# Altium PCB PCB.PcbDoc
Units mm, origin at the board's own origin, x right, y up, seen from the top; angles counter-clockwise.
Board outline 112.17 x 102 mm, 2 copper layers (Top Layer, Bottom Layer), stack 1.569 mm thick; 58 components, 27 nets, 185 pads, 328 vias.
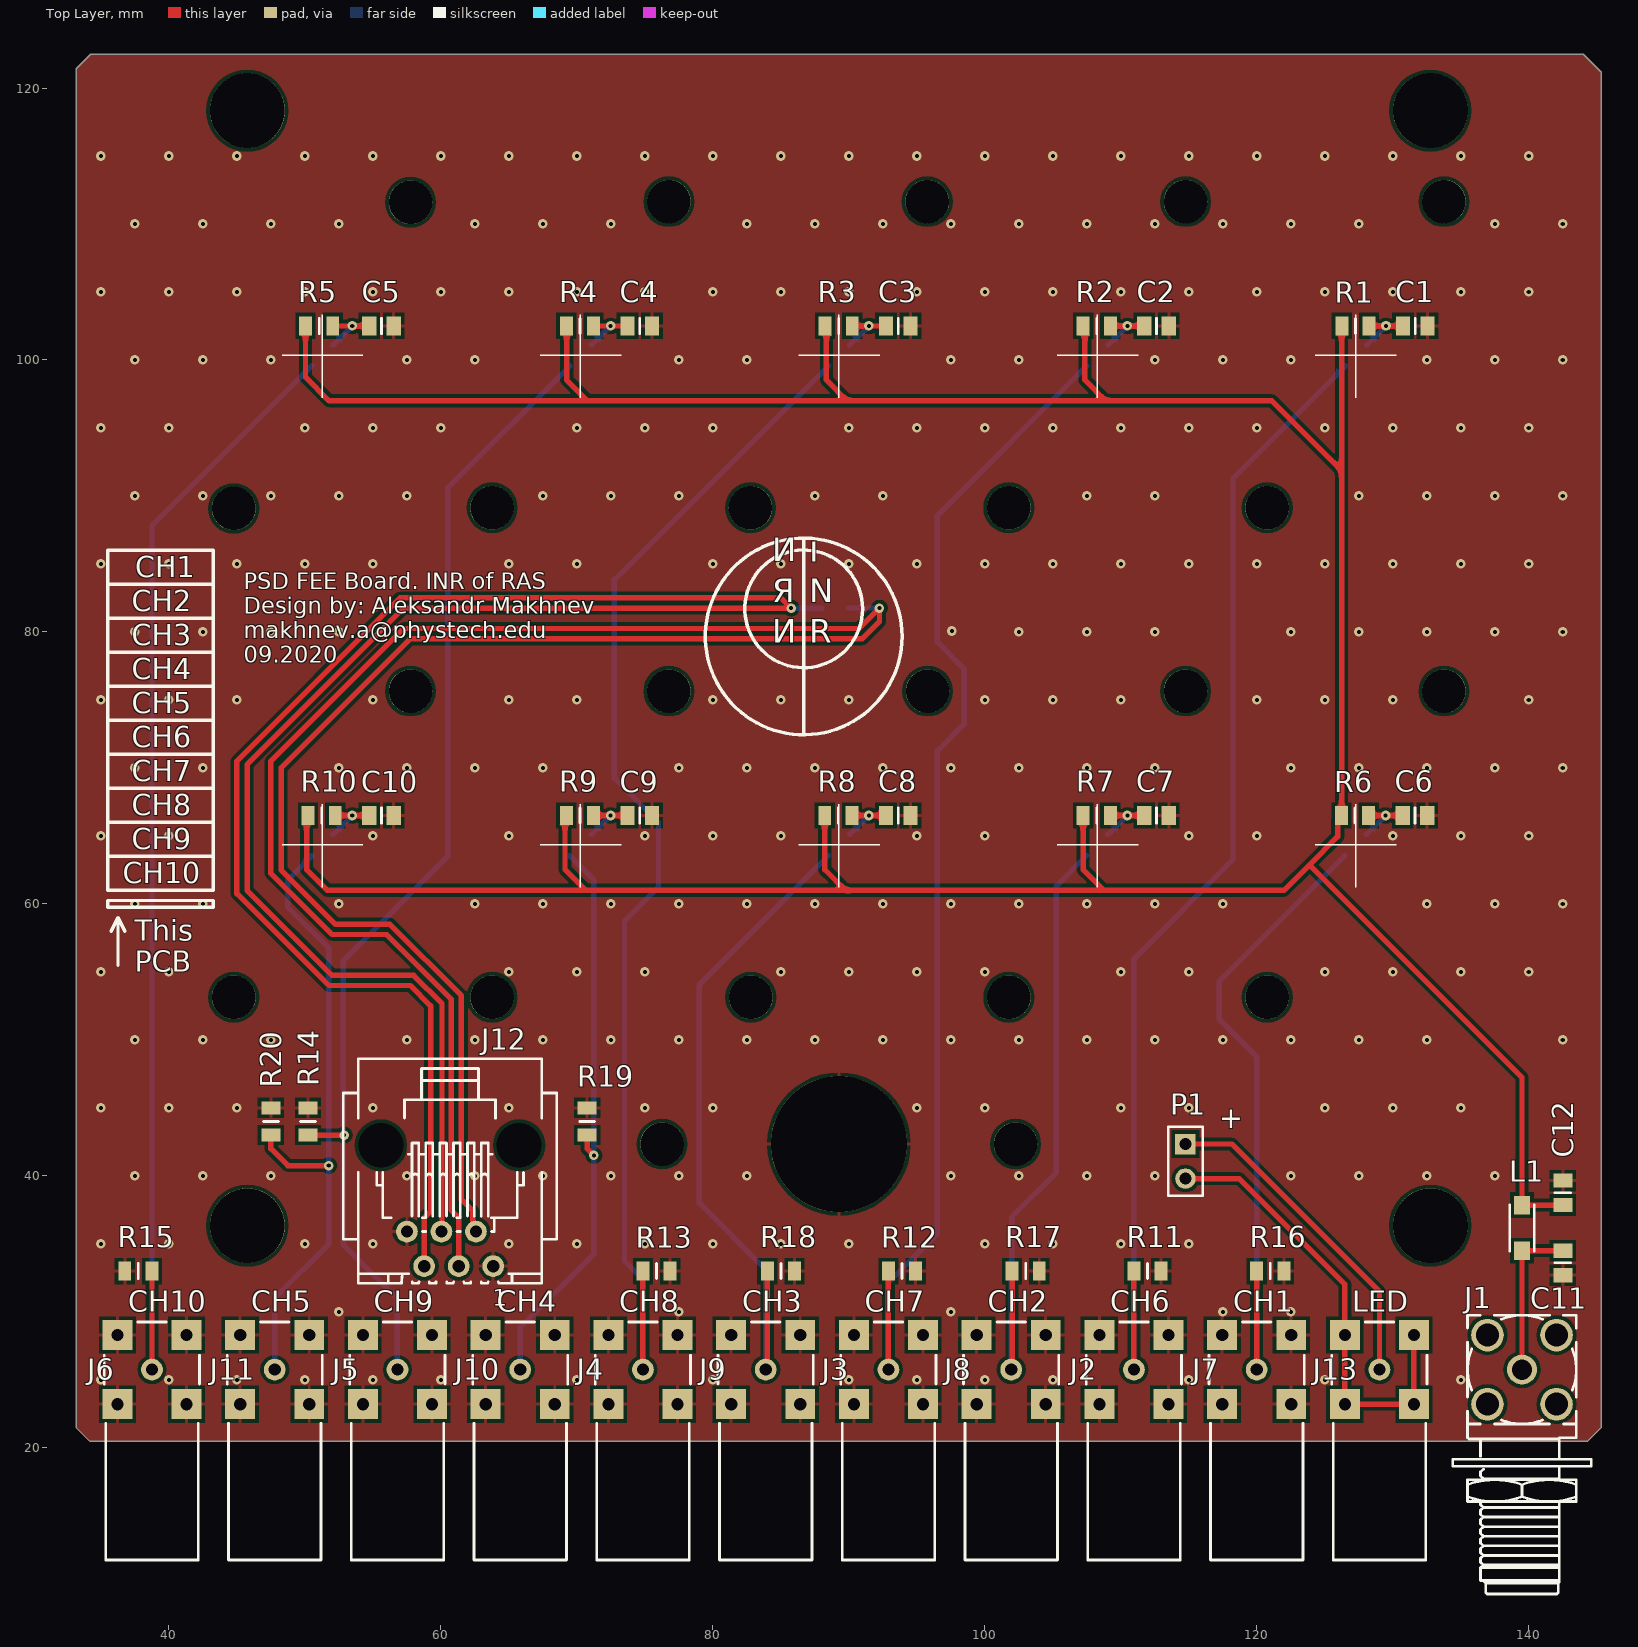
[diagram p0: Top Layer view]
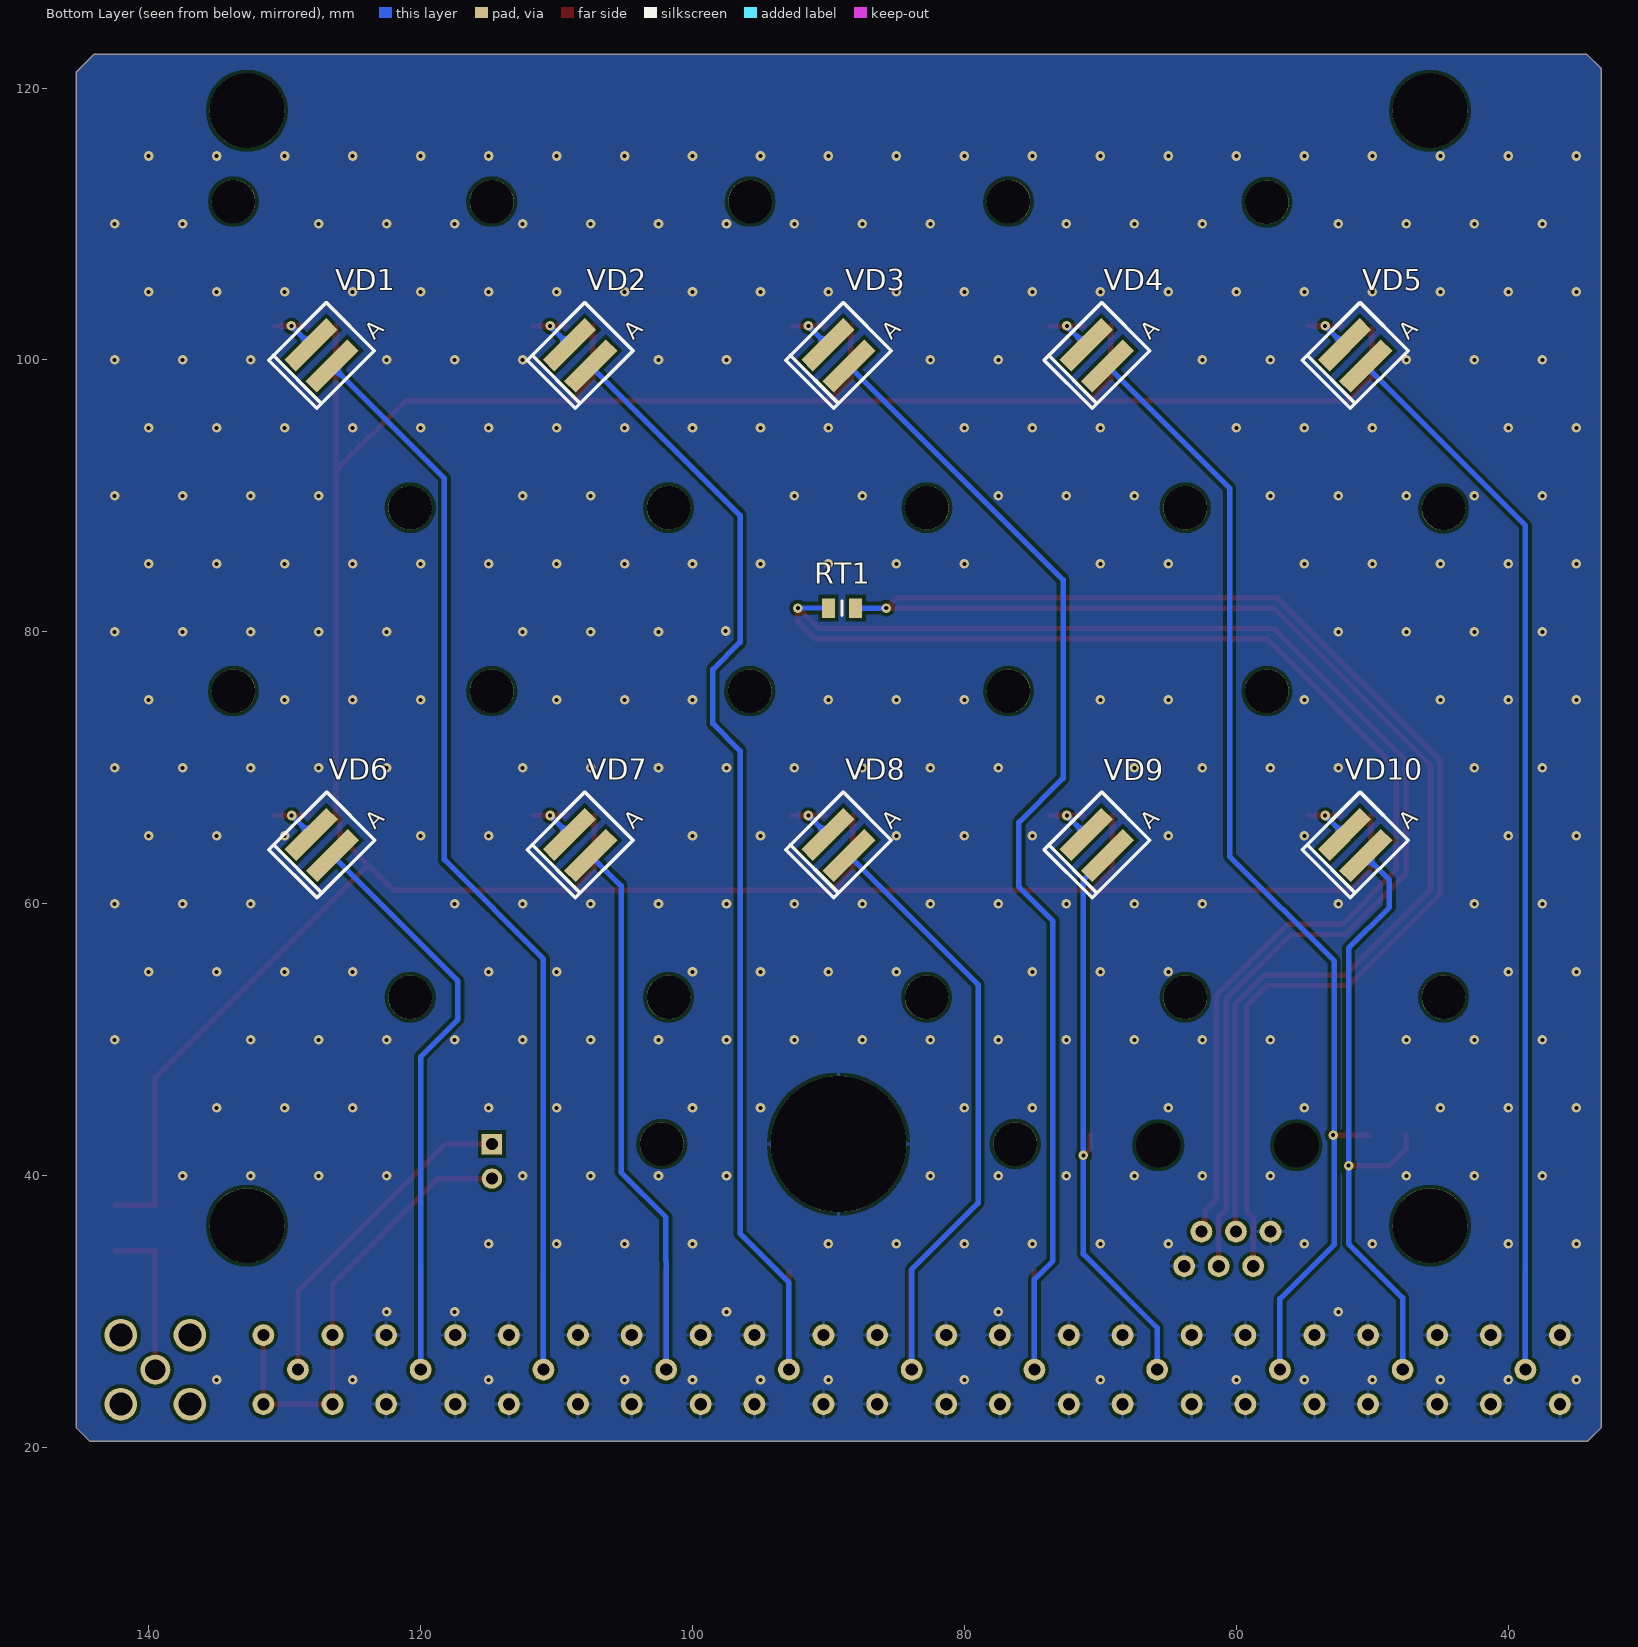
[diagram p1: Bottom Layer view, seen from below]
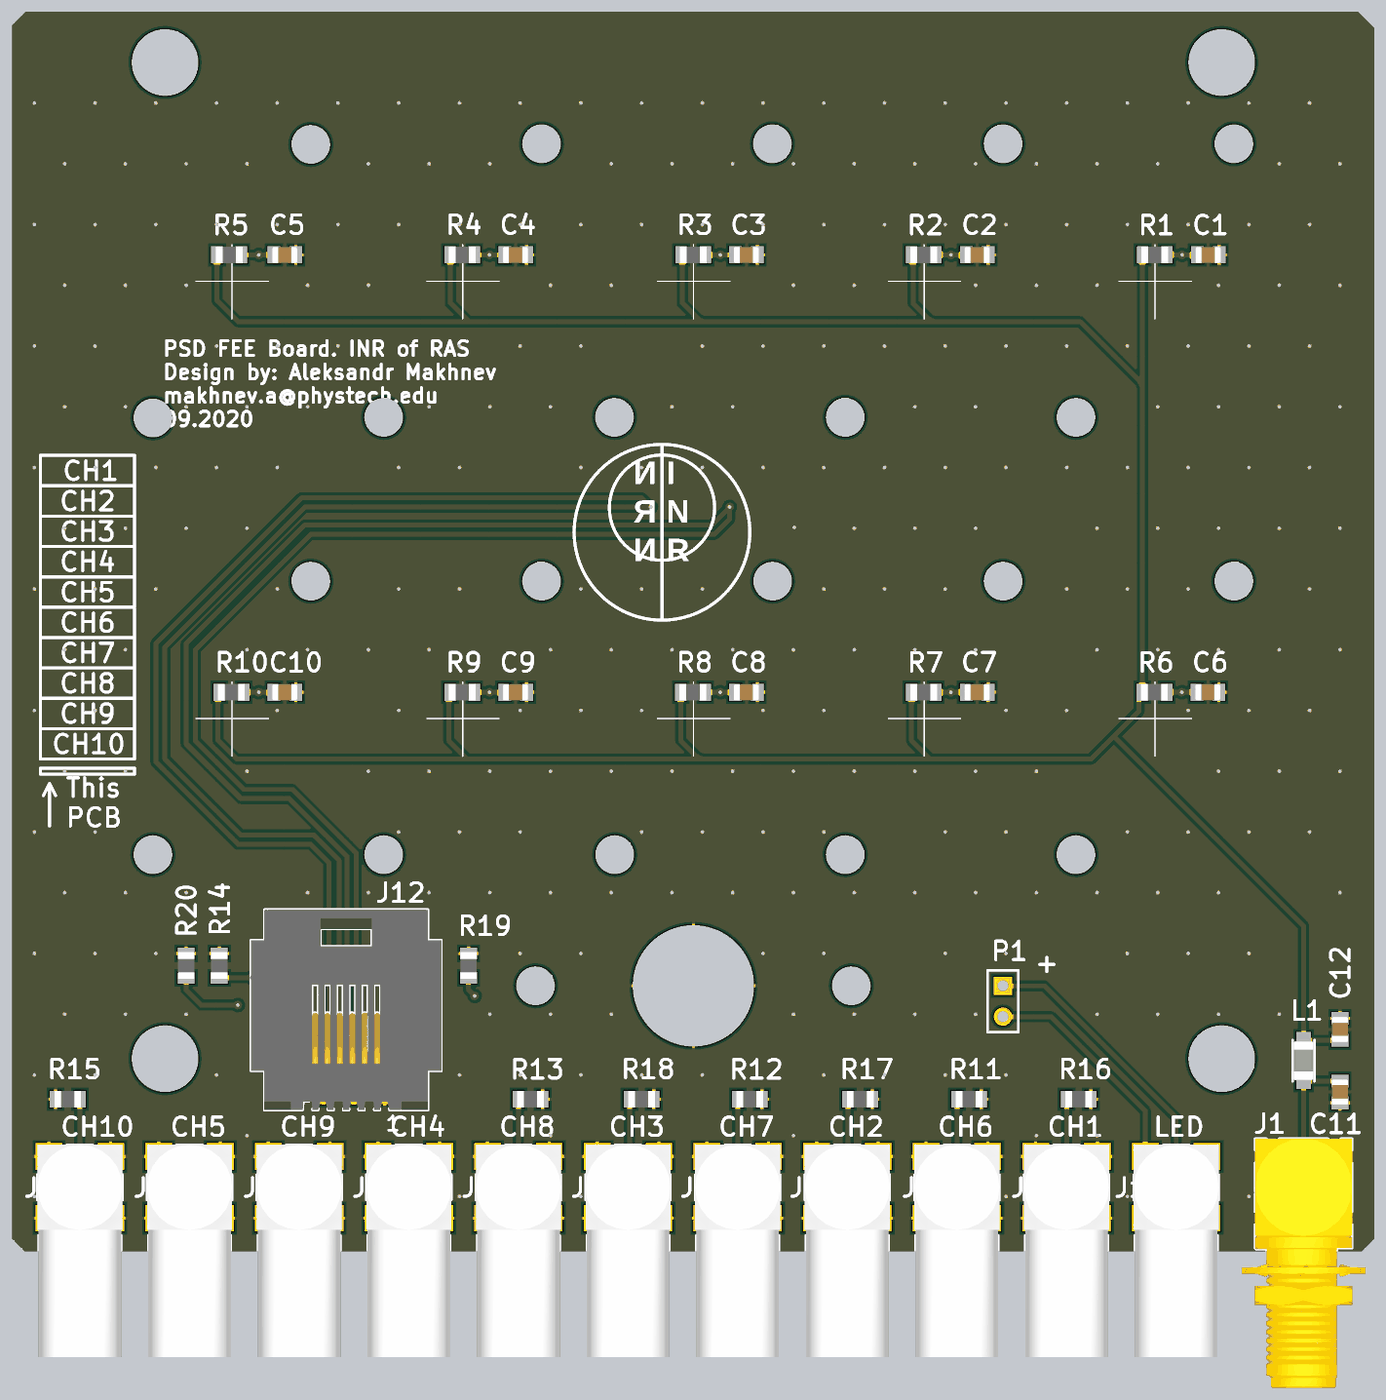
[diagram p2: 3D render of the assembled board from above, using the file's embedded part models]

## Layer stack, top to bottom
Top Solder: solder mask 0.0254, SM-001, Dk 4
Top Layer: signal copper 0.035
Dielectric 1: core 1.4986, Core-043, Dk 4.3
Bottom Layer: signal copper 0.035
Bottom Solder: solder mask 0.0254, SM-001, Dk 4

## Board outline
33.163,21.5 34.163,20.5 144.337,20.5 145.337,21.5 145.337,121.163 144,122.5 34.25,122.5 33.163,121.413

## Design rules (kind name [scope] priority, off if disabled: settings)
Clearance [All] p1: gap=0.254 ignorepadtopadclearanceinfootprint=FALSE except(0: Arc-Hole Track-Hole SMDPad-Hole THPad-Hole Via-Hole Fill-Hole Poly-Hole Region-Hole Text-Hole)
PolygonConnect PolygonConnect_stiching [IsVia] p1: connectstyle=Direct reliefconductorwidth=0.254 reliefentries=4 polygonreliefangle="90 Angle" airgapwidth=0.254
PolygonConnect [All] p2: connectstyle=Relief reliefconductorwidth=0.254 reliefentries=4 polygonreliefangle="90 Angle" airgapwidth=0.254
RoomDefinition Main [InComponentClass('Main')] p1: confinementstyle=ConfineIn formatcopy=TRUE lockcomponents=FALSE outline 31,7 146,7 146,126.75 31,126.75
RoutingVias [All] p1: holewidth=0.3 width=0.7 viastyle="Through Hole" minholewidth=0.3 minwidth=0.7 maxholewidth=0.3 maxwidth=0.7
SolderMaskExpansion [All] p1: expansion=0.102 istentingtop=FALSE
Width [All] p1: maxlimit=0.4 minlimit=0.15 preferedwidth=0.2
30 further rules are at their usual default settings.

## Components (designator, comment, footprint, x,y, rotation, side; value= is the part's Value field where it differs from the comment)
C1 "10nF" CAPC2012X135N 131.65,102.5 r180 top
C2 "10nF" CAPC2012X135N 112.625,102.5 r180 top
C3 "10nF" CAPC2012X135N 93.625,102.5 r180 top
C4 "10nF" CAPC2012X135N 74.625,102.5 r180 top
C5 "10nF" CAPC2012X135N 55.625,102.5 r180 top
C6 "10nF" CAPC2012X135N 131.625,66.5 r180 top
C7 "10nF" CAPC2012X135N 112.625,66.5 r180 top
C8 "10nF" CAPC2012X135N 93.625,66.5 r180 top
C9 "10nF" CAPC2012X135N 74.625,66.5 r180 top
C10 "10nF" CAPC2012X135N 55.625,66.5 r180 top
C11 "10nF" CAPC2012X135N 142.5,33.6 r90 top
C12 "10nF" CAPC2012X135N 142.5,38.75 r270 top
J1 "SMA" AMPHENOL_132203 139.5,25.75 r270 top
J2 "LEMO 00" LEMO_EPK.00.250.NTN 110.962,25.75 r270 top
J3 "LEMO 00" LEMO_EPK.00.250.NTN 92.909,25.75 r270 top
J4 "LEMO 00" LEMO_EPK.00.250.NTN 74.856,25.75 r270 top
J5 "LEMO 00" LEMO_EPK.00.250.NTN 56.803,25.75 r270 top
J6 "LEMO 00" LEMO_EPK.00.250.NTN 38.75,25.75 r270 top
J7 "LEMO 00" LEMO_EPK.00.250.NTN 119.989,25.75 r270 top
J8 "LEMO 00" LEMO_EPK.00.250.NTN 101.936,25.75 r270 top
J9 "LEMO 00" LEMO_EPK.00.250.NTN 83.883,25.75 r270 top
J10 "LEMO 00" LEMO_EPK.00.250.NTN 65.83,25.75 r270 top
J11 "LEMO 00" LEMO_EPK.00.250.NTN 47.777,25.75 r270 top
J12 "RJ12" WURTH_615006138521 60.67,34.63 r0 top
J13 "LEMO 00" LEMO_EPK.00.250.NTN 129.015,25.75 r270 top
L1 "50R@100MHz" IND_MURATA_BLM31PG 139.5,36.175 r90 top
P1 "Header 2" HDR1X2 114.75,42.337 r270 top
R1 "3R3" RESC2012X60N 127.25,102.5 r180 top
R2 "3R3" RESC2012X60N 108.225,102.5 r180 top
R3 "3R3" RESC2012X60N 89.25,102.5 r180 top
R4 "3R3" RESC2012X60N 70.225,102.5 r180 top
R5 "3R3" RESC2012X60N 51.041,102.5 r180 top
R6 "3R3" RESC2012X60N 127.225,66.5 r180 top
R7 "3R3" RESC2012X60N 108.225,66.5 r180 top
R8 "3R3" RESC2012X60N 89.225,66.5 r180 top
R9 "3R3" RESC2012X60N 70.225,66.5 r180 top
R10 "3R3" RESC2012X60N 51.225,66.5 r180 top
R11 "10k" RESC2012X60N 111.962,33 r180 top
R12 "10k" RESC2012X60N 93.909,33 r180 top
R13 "10k" RESC2012X60N 75.856,33 r180 top
R14 "10k" RESC2012X60N 50.225,44 r270 top
R15 "10k" RESC2012X60N 37.75,33 r0 top
R16 "10k" RESC2012X60N 120.989,33 r180 top
R17 "10k" RESC2012X60N 103,33 r180 top
R18 "10k" RESC2012X60N 85,33 r180 top
R19 "10k" RESC2012X60N 70.75,44 r270 top
R20 "10k" RESC2012X60N 47.5,44 r270 top
RT1 "500R" RESC2013X64N 89,81.75 r0 bottom
VD1 "S12572-010P Hamamatsu" S12572-010P 127.288,100.337 r135 bottom
VD2 "S12572-010P Hamamatsu" S12572-010P 108.263,100.337 r135 bottom
VD3 "S12572-010P Hamamatsu" S12572-010P 89.263,100.337 r135 bottom
VD4 "S12572-010P Hamamatsu" S12572-010P 70.263,100.337 r135 bottom
VD5 "S12572-010P Hamamatsu" S12572-010P 51.263,100.337 r135 bottom
VD6 "S12572-010P Hamamatsu" S12572-010P 127.263,64.337 r135 bottom
VD7 "S12572-010P Hamamatsu" S12572-010P 108.263,64.337 r135 bottom
VD8 "S12572-010P Hamamatsu" S12572-010P 89.263,64.337 r135 bottom
VD9 "S12572-010P Hamamatsu" S12572-010P 70.263,64.337 r135 bottom
VD10 "S12572-010P Hamamatsu" S12572-010P 51.263,64.337 r135 bottom

## Footprints (in the part's own frame and the unit in brackets; to place one, negate y for a bottom-side part, rotate by r counter-clockwise, add the part's x,y. Pads: shape width x height; smd on the part's side, far side on the other; paste and mask are expansions set on the pad)
AMPHENOL_132203 [mm] "50 Ohm Through Hole SMA Right Angle PCB Jack"
  round 2.2 hole 1.5: 1(0,0)
  round 2.4 hole 1.7: 2(-2.54,2.54) 2(-2.54,-2.54) 2(2.54,2.54) 2(2.54,-2.54)
  silkscreen extent -4,-5.1 16.5,5.1, body extent -4,-5.1 16.5,5.1, height 11.45
CAPC2012X135N [mm] "Chip Capacitor, Body 2.0x1.25mm, IPC Medium Density"
  rect 1.05x1.4 smd: 1(-0.9,0) 2(0.9,0)
  silkscreen extent 0,-0.58 0,0.58, body extent -1.05,-0.67 1.05,0.68, height 1.25
HDR1X2 [mm] "Connector; Header; 2 Position"
  rect 1.5x1.5 hole 0.9: 1(0,0)
  round 1.5 hole 0.9: 2(2.54,0)
  silkscreen extent -1.27,-1.27 3.81,1.27
IND_MURATA_BLM31PG [mm] "Chip Ferrite Bead, 3.20mm L X 1.60mm W, BLM31PG Series"
  rect 1.35x1.2 smd: 1(-1.675,0) 2(1.675,0)
  silkscreen extent -1.7,-0.9 1.7,0.9, body extent -1.6,-0.8 1.6,0.8, height 1.3
LEMO_EPK.00.250.NTN [mm] "50 Ohm size 00 Coaxial Elbow (90°) socket"
  round 1.6 hole 0.9: 1(0,0)
  rect 2.2x2.2 / inner round 1.6 / far side round 1.6 hole 0.9: 2(-2.54,2.54) 2(-2.54,-2.54) 2(2.54,2.54) 2(2.54,-2.54)
  silkscreen extent -3.5,-3.5 14,3.5, body extent -3.5,-3.5 14,3.5, height 7
RESC2012X60N [mm] "Chip Resistor, EIA 0805, Metric 2012, Body 2.0x1.2mm, IPC Medium Density"
  rect 0.95x1.4 smd: 1(-1,0) 2(1,0)
  silkscreen extent 0,-0.55 0,0.55, body extent -1.1,-0.67 1.1,0.68, height 0.6
RESC2013X64N [mm] "Chip Resistor, EIA 0805, Metric 2013, Body 2.03x1.27mm, IPC Medium Density"
  rect 0.95x1.45 smd: 1(-1,0) 2(1,0)
  silkscreen extent 0,-0.55 0,0.55, body extent -1.02,-0.63 1.02,0.64, height 0.64
S12572-010P [mm]
  rect 4.35x1.2 smd: 1(0,-1.1) 2(0,1.1)
  silkscreen extent -3,-2.5 3,2.5, body extent -2.18,-1.93 2.18,1.93, height 1.5
WURTH_615006138521 [mm] "RJ12 Connector, 6P6C,  Straight With Ears"
  round 1.6 hole 0.9: 1(3.175,-1.27) 2(1.905,1.27) 3(0.635,-1.27) 4(-0.635,1.27) 5(-1.905,-1.27) 6(-3.175,1.27)
  round 1 hole 3.3 unplated mask+1.1: M1(-5.08,7.62) M2(5.08,7.62)
  silkscreen extent -7.85,-2.52 7.85,13.98, body extent -7.85,-2.52 7.85,13.98, height 16.3

## Part data
C1 C2 C3 C4 C5 C6 C7 C8 C9 C10 C11 C12: library part CC0805_10NF_50V_5%_X7R, "Non-polarised capacitor", Case=0805, Manufacturer=GENERIC, Manufacturer1 ComponentHeight=0.94mm, Manufacturer1 Example=AVX, Manufacturer1 Part Number=08055C103JAT2A, Tolerance=±5%, Voltage=50V, Author="CERN DEM JLC", Component Type=Standard, CreateDate=18.01.2011, HelpURL=\\cern.ch\dfs\Applications\Altium\Datasheets\CC0805_X7R_AVX.pdf, LatestRevisionDate=18.01.2011, Manufacturer Part Number=CC0805_10NF_50V_5%_X7R, Mounted=Yes, Part Description="SMD Multilayer Chip Ceramic Capacitor", Part Number=CC0805_10NF_50V_5%_X7R, Pin Count=2, Sense=No, SMD=Yes, Socket=No, Status=None, TC=X7R
J1: library part AMPHENOL_132203, Manufacturer=AMPHENOL, Manufacturer Part Number=132203, Author="CERN DEM MR", ComponentHeight=10.44mm, Component Type=Standard, CreateDate=06.10.2016, Family=SMA, HelpURL=\\cern.ch\dfs\Applications\Altium\Datasheets\AMPHENOL_132203.pdf, LatestRevisionDate=06.10.2016, Mounted=Yes, Part Description="50 Ohm Through Hole SMA Right Angle PCB Jack", Part Number=AMPHENOL_132203, Pin Count=5, PressFit=No, Sense=No, SMD=No, Socket=No, Status=None
J2 J3 J4 J5 J6 J7 J8 J9 J10 J11 J13: library part LEMO_EPK.00.250.NTN, Manufacturer=LEMO, Manufacturer Part Number=EPK.00.250.NTN, Author="CERN DEM JLC", ComponentHeight=7mm, Component Type=Standard, CreateDate=04.09.2012, Family="LEMO 00", HelpURL=\\cern.ch\dfs\Applications\Altium\Datasheets\LEMO_EPK.00.250.NTN.pdf, LatestRevisionDate=04.09.2012, Mounted=Yes, Part Description="Size 00, 50 Ohms Coaxial Elbow (90°) socket With Clearance Under The Body", Part Number=LEMO_EPK.00.250.NTN, Pin Count=2, PressFit=No, SCEM=09.46.11.180.6, Sense=No, SMD=No, Socket=No, Status=None
J12: library part WURTH_615006138521, "Connector RJ12 (6P6C)", Manufacturer="WURTH ELEKTRONIK", Manufacturer Part Number=615006138521, Author="CERN DEM MR", ComponentHeight=16.15mm, Component Type=Standard, CreateDate=15.03.2016, Family=RJ12, HelpURL=\\cern.ch\dfs\Applications\Altium\Datasheets\WURTH_615006138521.pdf, LatestRevisionDate=15.03.2016, Mounted=Yes, Part Description="1 Port RJ12 Connector, 6P6C,  Straight With Ears", Part Number=WURTH_615006138521, Pin Count=6, PressFit=No, Sense=No, SMD=No, Socket=No, Status=None
L1: library part IND1206_MURATA_BLM31PG500SN1, "Inductor", Case=1206, Manufacturer=MURATA, Manufacturer Part Number=BLM31PG500SN1, Power=3.5A, Resistance=0.015R, Author="CERN DEM JLC", Component Type=Standard, ComponentHeight=1.3mm, CreateDate=05.12.2013, HelpURL=\\cern.ch\dfs\Applications\Altium\Datasheets\IND1206_MURATA_BLM31P.pdf, LatestRevisionDate=05.12.2013, Mounted=Yes, Part Description="SMD EMIFIL Chip Ferrite Bead", Part Number=IND1206_MURATA_BLM31PG500SN1, Pin Count=2, Sense=No, SMD=Yes, Socket=No, Status=None
P1: "Header, 2-Pin", LatestRevisionDate=17-Jul-2002, LatestRevisionNote="Re-released for DXP Platform.", Publisher="Altium Limited"
R1 R2 R3 R4 R5 R6 R7 R8 R9 R10: library part R0805_3R3_1%_0.125W_200PPM, "Resistor - 1%", Case=0805, Manufacturer=GENERIC, Manufacturer1 ComponentHeight=0.65mm, Manufacturer1 Example="YAGEO PHYCOMP", Manufacturer1 Part Number="232273463308L or RC0805FR-073R3L", Power=0.125W, Tolerance=±1%, Author="CERN DEM JLC", Component Type=Standard, CreateDate=03.12.2007, HelpURL=\\cern.ch\dfs\Applications\Altium\Datasheets\R0805_Phycomp_RC0805.pdf, LatestRevisionDate=17.10.2012, Manufacturer Part Number=R0805_3R3_1%_0.125W_200PPM, Mounted=Yes, Part Description="General Purpose Thick Film Chip Resistor", Part Number=R0805_3R3_1%_0.125W_200PPM, Pin Count=2, PressFit=No, Sense=No, SMD=Yes, Socket=No, Status=Preferred, TC=±200ppm/°C
R11 R12 R13 R14 R15 R16 R17 R18 R19 R20: library part R0805_10K_1%_0.125W_100PPM, "Resistor - 1%", Case=0805, Manufacturer=GENERIC, Manufacturer1 ComponentHeight=0.6mm, Manufacturer1 Example="NIC COMPONENT", Manufacturer1 Part Number=NRC10F1002TRF, Power=0.125W, Tolerance=±1%, Author="CERN DEM JLC", Component Type=Standard, CreateDate=03.12.2007, HelpURL=\\cern.ch\dfs\Applications\Altium\Datasheets\R0805_NIC_NRC.pdf, LatestRevisionDate=13.03.2008, Manufacturer Part Number=R0805_10K_1%_0.125W_100PPM, Mounted=Yes, Part Description="General Purpose Thick Film Chip Resistor", Part Number=R0805_10K_1%_0.125W_100PPM, Pin Count=2, PressFit=No, Sense=No, SMD=Yes, Socket=No, Status=Preferred, TC=±100ppm/°C
RT1: library part THERM_PTC_500R_EPCOS_B59755B0115A070, "Thermistor NTC (Positive Temperature Coefficient)", Manufacturer=EPCOS, Manufacturer Part Number=B59755B0115A070, Power=28mA, Tolerance=±25%, Voltage=500VDC, Author="CERN DEM BC", ComponentHeight=16.5mm, Component Type=Standard, CreateDate=13.11.2015, HelpURL=\\cern.ch\dfs\Applications\Altium\Datasheets\THERM_EPCOS_B5975xx.pdf, LatestRevisionDate=13.11.2015, Mounted=Yes, Part Description="PTC Thermistors for Overcurrent Protection", Part Number=THERM_PTC_500R_EPCOS_B59755B0115A070, Pin Count=2, Sense=No, SMD=No, Socket=No, Status=None
VD1 VD2 VD3 VD4 VD5 VD6 VD7 VD8 VD9 VD10: library part S12572-010P, Manufacturer=Hamamatsu, Name=S12572-010P

## Free pads (board coordinates)
  round 3.2 hole 3.2 unplated: 0(44.763,53.129) 0(44.763,89.079) 0(57.763,75.645) 0(57.763,111.595) 0(63.763,53.129) 0(63.763,89.129) 0(76.263,42.337) 0(76.763,75.645) 0(76.763,111.645) 0(82.763,89.129) 0(82.788,53.129) 0(95.763,111.645) 0(95.788,75.645) 0(101.763,53.129) 0(101.763,89.129) 0(102.263,42.337) 0(114.763,75.645) 0(114.763,111.645) 0(120.763,53.129) 0(120.763,89.129) 0(133.763,75.645) 0(133.763,111.645)
  round 5.5 hole 5.5 unplated: 0(45.763,36.337) 0(45.763,118.337) 0(132.763,36.337) 0(132.763,118.337)
  round 10 hole 10 unplated: 0(89.263,42.337)

## Via types
v1: diameter 0.7, hole 0.3, Top Layer to Bottom Layer, tented both sides, 328 vias

## Nets (pads, with @x,y where several pads share a name; then routed paths per layer and width w, separated by ;. In a path a pad name is that pad's centre, name@x,y a point inside that pad or via, vN(x,y) a via of type N, cw(c..) or ccw(c..) an arc to the next point about the centre after c; other vN are vias at no path point)
GND: C1.1 C2.1 C3.1 C4.1 C5.1 C6.1 C7.1 C8.1 C9.1 C10.1 C11.1 C12.1 J2.2 J3.2 J4.2 J5.2 J6.2 J7.2 J8.2 J9.2 J10.2 J11.2 J12.1 J12.6 pad.0@89.263,42.337 R11.1 R12.1 R13.1 R14.1 R15.1 R16.1 R17.1 R18.1 R19.1 R20.1
  other v1: 35,25 40,25 45,25 50,25 55,25 60,25 70,25 80,25 90,25 95,25 100,25 105,25 115,25 125,25 135,25 52.5,30 77.5,30 97.5,30 117.5,30 122.5,30 35,35 40,35 50,35 55,35 65,35 70,35 75,35 80,35 85,35 90,35 100,35 105,35 110,35 115,35 37.5,40 42.5,40 47.5,40 57.5,40 62.5,40 67.5,40 72.5,40 77.5,40 82.5,40 97.5,40 102.5,40 107.5,40 112.5,40 122.5,40 127.5,40 132.5,40 137.5,40 35,45 40,45 45,45 55,45 65,45 75,45 80,45 95,45 100,45 110,45 115,45 125,45 130,45 135,45 37.5,50 42.5,50 47.5,50 57.5,50 62.5,50 67.5,50 72.5,50 77.5,50 82.5,50 87.5,50 92.5,50 97.5,50 102.5,50 107.5,50 112.5,50 117.5,50 122.5,50 127.5,50 132.5,50 142.5,50 35,55 40,55 65,55 70,55 75,55 85,55 90,55 95,55 100,55 110,55 115,55 125,55 130,55 135,55 140,55 37.5,60 42.5,60 52.5,60 62.5,60 67.5,60 72.5,60 77.5,60 82.5,60 87.5,60 92.5,60 97.5,60 102.5,60 107.5,60 112.5,60 117.5,60 132.5,60 137.5,60 142.5,60 35,65 40,65 55,65 65,65 75,65 80,65 85,65 95,65 100,65 115,65 120,65 130,65 135,65 140,65 37.5,70 42.5,70 52.5,70 57.5,70 62.5,70 67.5,70 77.5,70 82.5,70 87.5,70 92.5,70 97.5,70 102.5,70 107.5,70 112.5,70 122.5,70 127.5,70 132.5,70 137.5,70 142.5,70 35,75 40,75 45,75 55,75 65,75 70,75 80,75 85,75 90,75 100,75 105,75 110,75 120,75 125,75 130,75 140,75 37.5,80 42.5,80 47.5,80 52.5,80 102.5,80 107.5,80 112.5,80 122.5,80 127.5,80 132.5,80 137.5,80 142.5,80 97.569,80.069 35,85 40,85 45,85 50,85 55,85 65,85 70,85 80,85 85,85 90,85 95,85 100,85 105,85 110,85 115,85 120,85 125,85 130,85 135,85 140,85 37.5,90 42.5,90 47.5,90 52.5,90 57.5,90 67.5,90 72.5,90 77.5,90 87.5,90 92.5,90 107.5,90 112.5,90 127.5,90 132.5,90 137.5,90 142.5,90 35,95 40,95 50,95 55,95 60,95 70,95 75,95 80,95 90,95 95,95 100,95 105,95 110,95 115,95 120,95 125,95 130,95 135,95 140,95 37.5,100 42.5,100 47.5,100 57.5,100 62.5,100 77.5,100 82.5,100 97.5,100 102.5,100 112.5,100 117.5,100 122.5,100 132.5,100 137.5,100 142.5,100 35,105 40,105 45,105 50,105 55,105 60,105 65,105 70,105 75,105 80,105 85,105 90,105 95,105 100,105 105,105 110,105 115,105 120,105 125,105 130,105 135,105 140,105 37.5,110 42.5,110 47.5,110 52.5,110 62.5,110 67.5,110 72.5,110 82.5,110 87.5,110 92.5,110 97.5,110 102.5,110 107.5,110 112.5,110 117.5,110 122.5,110 127.5,110 137.5,110 142.5,110 35,115 40,115 45,115 50,115 55,115 60,115 65,115 70,115 75,115 80,115 85,115 90,115 95,115 100,115 105,115 110,115 115,115 120,115 125,115 130,115 135,115 140,115
NetC1_2: C1.2 R1.1 VD1.2 | length 4.5
  Top Layer w0.381: R1.1 v1(129.5,102.5) C1.2
  Bottom Layer w0.381: VD1.2 128.115,101.115 v1(129.5,102.5)
NetC2_2: C2.2 R2.1 VD2.2 | length 4.5
  Top Layer w0.381: R2.1 v1(110.475,102.5) C2.2
  Bottom Layer w0.381: VD2.2 109.09,101.115 v1(110.475,102.5)
NetC3_2: C3.2 R3.1 VD3.2 | length 4.5
  Top Layer w0.381: R3.1@90.225,102.5 v1(91.475,102.5) C3.2
  Bottom Layer w0.381: VD3.2 90.09,101.115 v1(91.475,102.5)
NetC4_2: C4.2 R4.1 VD4.2 | length 4.5
  Top Layer w0.381: R4.1 v1(72.475,102.5) C4.2
  Bottom Layer w0.381: VD4.2 71.09,101.115 v1(72.475,102.5)
NetC5_2: C5.2 R5.1 VD5.2 | length 4.5
  Top Layer w0.381: R5.1@52.225,102.5 v1(53.475,102.5) C5.2
  Bottom Layer w0.381: VD5.2 52.09,101.115 v1(53.475,102.5)
NetC6_2: C6.2 R6.1 VD6.2 | length 4.5
  Top Layer w0.381: R6.1 v1(129.475,66.5) C6.2
  Bottom Layer w0.381: VD6.2 128.09,65.115 v1(129.475,66.5)
NetC7_2: C7.2 R7.1 VD7.2 | length 4.5
  Top Layer w0.381: R7.1 v1(110.475,66.5) C7.2
  Bottom Layer w0.381: VD7.2 109.09,65.115 v1(110.475,66.5)
NetC8_2: C8.2 R8.1 VD8.2 | length 4.5
  Top Layer w0.381: R8.1 v1(91.475,66.5) C8.2
  Bottom Layer w0.381: VD8.2 90.09,65.115 v1(91.475,66.5)
NetC9_2: C9.2 R9.1 VD9.2 | length 4.5
  Top Layer w0.381: R9.1 v1(72.475,66.5) C9.2
  Bottom Layer w0.381: VD9.2 71.09,65.115 v1(72.475,66.5)
NetC10_2: C10.2 R10.1 VD10.2 | length 4.5
  Top Layer w0.381: R10.1 v1(53.475,66.5) C10.2
  Bottom Layer w0.381: VD10.2 52.09,65.115 v1(53.475,66.5)
NetC11_2: C11.2 J1.1 L1.1 | length 11.8
  Top Layer w0.4: J1.1 L1.1 C11.2
NetC12_2: C12.2 L1.2 R1.2 R2.2 R3.2 R4.2 R5.2 R6.2 R7.2 R8.2 R9.2 R10.2 | length 273.6
  Top Layer w0.4: R5.2@50.041,102.291 50.041,98.734 51.775,97 70.775,97 ; R10.2@50.125,66.5 50.125,62.525 51.65,61 70.65,61 ; R9.2@69.125,66.5 69.125,62.525 70.65,61 ; R4.2@69.25,102.5 69.25,98.525 70.775,97 ; R8.2 88.225,62.525 89.75,61 ; R3.2@88.35,102.5 88.35,98.525 89.875,97 ; R7.2 107.225,62.525 108.75,61 ; R2.2@107.35,102.5 107.35,98.525 108.875,97 ; R1.2 126.237,102.488 126.237,91.863 ; L1.2 C12.2 ; L1.2@139.5,37.875 139.5,47.25 123.875,62.875 ; 70.65,61 89.75,61 ; 70.775,97 89.875,97 ; 89.75,61 108.75,61 ; 89.875,97 108.875,97 ; 108.75,61 122,61 123.875,62.875 ; 108.875,97 121.1,97 126.237,91.863 ; 123.875,62.875 125.95,64.95 125.95,66.225 R6.2 126.237,66.513 126.237,91.863
NetJ2_1: J2.1 R11.2 VD1.1 | length 87.5
  Top Layer w0.4: J2.1 R11.2
  Bottom Layer w0.4: J2.1 110.962,55.962 118.25,63.25 118.25,91.299 VD1.1
NetJ3_1: J3.1 R12.2 VD2.1 | length 88.8
  Top Layer w0.4: J3.1 R12.2
  Bottom Layer w0.4: J3.1 92.909,32.159 96.5,35.75 96.5,71.25 98.5,73.25 98.5,77.25 96.5,79.25 96.5,88.574 VD2.1
NetJ4_1: J4.1 R13.2 VD3.1 | length 90.7
  Top Layer w0.4: J4.1 R13.2
  Bottom Layer w0.4: J4.1@75,25.894 J4.1 74.856,32.394 73.5,33.75 73.5,58.75 76,61.25 76,66 72.75,69.25 72.75,83.824 VD3.1
NetJ5_1: J5.1 R14.2 VD4.1 | length 85
  Top Layer w0.4: R14.2 v1(52.884,43)
  Bottom Layer w0.4: J5.1 56.803,30.947 52.82,34.93 52.82,42.724 52.827,42.73 52.827,42.993 52.82,43 52.827,43.007 52.827,43.27 52.82,43.276 52.82,55.82 60.5,63.5 60.5,90.574 VD4.1
NetJ6_1: J6.1 R15.2 VD5.1 | length 85.9
  Top Layer w0.4: J6.1 R15.2
  Bottom Layer w0.4: J6.1 38.75,87.824 VD5.1
NetJ7_1: J7.1 R16.2 VD6.1 | length 50
  Top Layer w0.4: J7.1 R16.2
  Bottom Layer w0.4: J7.1 119.989,29.239 120,29.25 120,48.75 117.25,51.5 117.25,54.324 VD6.1
NetJ8_1: J8.1 R17.2 VD7.1 | length 47.4
  Top Layer w0.4: J8.1@102,25.75 R17.2
  Bottom Layer w0.4: J8.1 101.936,33.755 101.968,33.787 101.968,36.968 105.25,40.25 105.25,61.324 VD7.1
NetJ9_1: J9.1 R18.2 VD8.1 | length 51
  Top Layer w0.4: J9.1@84,25.75 R18.2
  Bottom Layer w0.4: J9.1 83.883,33.117 79,38 79,54.074 85,60.074 VD8.1
NetJ10_1: J10.1 R19.2 VD9.1 | length 42.5
  Top Layer w0.4: R19.2 70.75,42 v1(71.25,41.5)
  Bottom Layer w0.4: J10.1 65.83,28.83 71.25,34.25 v1(71.25,41.5) 71.25,61.75 69.485,63.515 VD9.1
NetJ11_1: J11.1 R20.2 VD10.1 | length 47.2
  Top Layer w0.4: R20.2 47.5,42 48.75,40.75 v1(51.75,40.75)
  Bottom Layer w0.4: J11.1 47.777,31.027 51.75,35 v1(51.75,40.75) 51.75,56.75 48.75,59.75 48.75,61.75 50.485,63.485 VD10.1
NetJ12_2: J12.2 J12.3 RT1.2 | length 188.7
  Top Layer w0.4: J12.3 61.305,36.945 60.75,37.5 60.75,53 56,57.75 52,57.75 47.5,62.25 47.5,70.5 57.25,80.25 90.75,80.25 v1(92.25,81.75) 92.25,80.75 91,79.5 57.75,79.5 48.25,70 48.25,62.5 52.25,58.5 56.25,58.5 61.5,53.25 61.5,38.25 62.345,37.405 62.345,36.13 J12.2
  Bottom Layer w0.381: RT1.2@89.985,81.75 RT1.2 v1(92.25,81.75)
  Bottom Layer w0.4: J12.3@61.289,33.376 J12.3
NetJ12_4: J12.4 J12.5 RT1.1 | length 183.6
  Top Layer w0.4: J12.5 58.765,36.91 59.25,37.395 59.25,52.5 57.75,54 51.75,54 45,60.75 45,70.5 57,82.5 85,82.5 v1(85.75,81.75) 57.25,81.75 45.75,70.25 45.75,61 52,54.75 58,54.75 60.08,52.67 60.08,35.945 J12.4
  Bottom Layer w0.4: v1(85.75,81.75) RT1.1
NetJ13_1: J13.1 P1.1 | length 24.5
  Top Layer w0.381: P1.1 118.163,42.337 129.015,31.485 J13.1
NetJ13_2: J13.2 P1.2 | length 33.9
  Top Layer w0.4: P1.2 118.703,39.797 126.475,32.025 126.475,28.29 126.475,23.21 131.555,23.21 J13.2@131.555,28.29
pads on no net: J1.2 J12.M1 J12.M2

## Polygon pours and split planes (outlines as drawn)
GND on Top Layer "Top Layer-GND" (solid, remove dead copper, pour order 0): 34.25,122.5 144,122.5 145.337,121.163 145.337,21.5 144.337,20.5 34.163,20.5 33.163,21.5 33.163,121.413
GND on Bottom Layer "Bottom Layer-GND" (solid, remove dead copper, pour order 2): 34.25,122.5 144,122.5 145.337,121.163 145.337,21.5 144.337,20.5 34.163,20.5 33.163,21.5 33.163,121.413

## Silkscreen, mask and mechanical layers (free items; w line width, h text height)
Top Overlay:
  circle w0.254: c86.677,81.698 r4.329
  circle w0.254: c86.677,79.669 r7.232
  lines w0.1: 48.313,64.337 54.263,64.337 ; 48.313,100.337 54.263,100.337 ; 51.263,61.237 51.263,67.337 ; 51.263,97.237 51.263,103.337 ; 67.313,64.337 73.263,64.337 ; 67.313,100.337 73.263,100.337 ; 70.263,61.237 70.263,67.337 ; 70.263,97.237 70.263,103.337 ; 86.313,64.337 92.263,64.337 ; 86.313,100.337 92.263,100.337 ; 89.263,61.237 89.263,67.337 ; 89.263,97.237 89.263,103.337 ; 105.313,64.337 111.263,64.337 ; 105.313,100.337 111.263,100.337 ; 108.263,61.237 108.263,67.337 ; 108.263,97.237 108.263,103.337 ; 124.313,64.337 130.263,64.337 ; 124.313,100.337 130.263,100.337 ; 127.263,61.237 127.263,67.337 ; 127.263,97.237 127.263,103.337
  lines w0.254: 35.5,63.5 43.25,63.5 ; 35.5,66 43.25,66 ; 35.5,68.5 43.25,68.5 ; 35.5,71 43.25,71 ; 35.5,73.5 43.25,73.5 ; 35.5,76 43.25,76 ; 35.5,78.5 43.25,78.5 ; 35.5,81 43.25,81 ; 35.5,83.5 43.25,83.5 ; 35.75,58 36.25,59 ; 36.25,55.5 36.25,59 ; 36.75,58 36.25,59 ; 86.677,72.498 86.677,86.898 ; 35.5,59.75 35.5,60.25 43.25,60.25 43.25,59.75 35.5,59.75 ; 35.5,61 35.5,86 43.25,86 43.25,61 35.5,61
  text "CH1" at 37.504,84.004 h1.52
  text "CH2" at 37.25,81.504 h1.52
  text "CH3" at 37.25,79.004 h1.52
  text "И / Я / И" at 84.377,78.598 h3
  text "I / N / R" at 87.077,78.598 h3
  text "PSD FEE Board. INR of RAS / Design by: Aleksandr Makhnev / makhnev.a@phystech.edu / 09.2020" at 45.5,77.75 h1.2
  text "CH4" at 37.25,76.504 h1.52
  text "CH5" at 37.25,74.004 h1.52
  text "CH6" at 37.25,71.504 h1.52
  text "CH7" at 37.25,69.004 h1.52
  text "CH8" at 37.25,66.504 h1.52
  text "CH9" at 37.25,64.004 h1.52
  text "CH10" at 36.615,61.504 h1.52
  text "This / PCB" at 37.5,55 h1.52
  text "+" at 117.254,43.5 h1.52
  text "CH10" at 37.015,30.004 h1.52
  text "CH5" at 46.042,30.004 h1.52
  text "CH9" at 55.068,30.004 h1.52
  text "CH4" at 64.095,30.004 h1.52
  text "CH8" at 73.121,30.004 h1.52
  text "CH3" at 82.148,30.004 h1.52
  text "CH7" at 91.174,30.004 h1.52
  text "CH2" at 100.201,30.004 h1.52
  text "CH6" at 109.227,30.004 h1.52
  text "CH1" at 118.254,30.004 h1.52
  text "LED" at 127.004,30.004 h1.52
Mechanical 1:
  circle w0.254: c45.763,36.337 r4.4
  circle w0.254: c132.763,36.337 r4.4
  lines w0.254: 25.25,32.25 74.856,32.25 ; 44.763,89.079 51.263,89.079 51.263,100.337 51.263,111.595 57.763,111.595 ; 76.263,42.337 102.263,42.337 ; 89.263,42.337 89.263,64.337 ; 33.163,21.5 33.163,121.413 34.25,122.5 144,122.5 145.337,121.163 145.337,21.5 144.337,20.5 34.163,20.5 33.163,21.5

## Text inside footprints (layer, text, board x,y; h text height)
J12: Top Overlay "1" at 63.815,30.43 h1.2; Mechanical 14 "1" at 63.955,30.023 h1.2
VD1: Bottom Overlay "A" at 123.399,101.398 h1.2 r315
VD2: Bottom Overlay "A" at 104.374,101.398 h1.2 r315
VD3: Bottom Overlay "A" at 85.374,101.398 h1.2 r315
VD4: Bottom Overlay "A" at 66.374,101.398 h1.2 r315
VD5: Bottom Overlay "A" at 47.374,101.398 h1.2 r315
VD6: Bottom Overlay "A" at 123.374,65.398 h1.2 r315
VD7: Bottom Overlay "A" at 104.374,65.398 h1.2 r315
VD8: Bottom Overlay "A" at 85.374,65.398 h1.2 r315
VD9: Bottom Overlay "A" at 66.374,65.398 h1.2 r315
VD10: Bottom Overlay "A" at 47.374,65.398 h1.2 r315